# Altium PCB WeatherStation.PcbDoc
Units mil, origin at the board's own origin, x right, y up, seen from the top; angles counter-clockwise.
Board outline 2395 x 2985 mil, 2 copper layers (Top Layer, Bottom Layer); 17 components, 15 nets, 94 pads, 0 vias.
Unrouted connection lines stored in the file: 19.
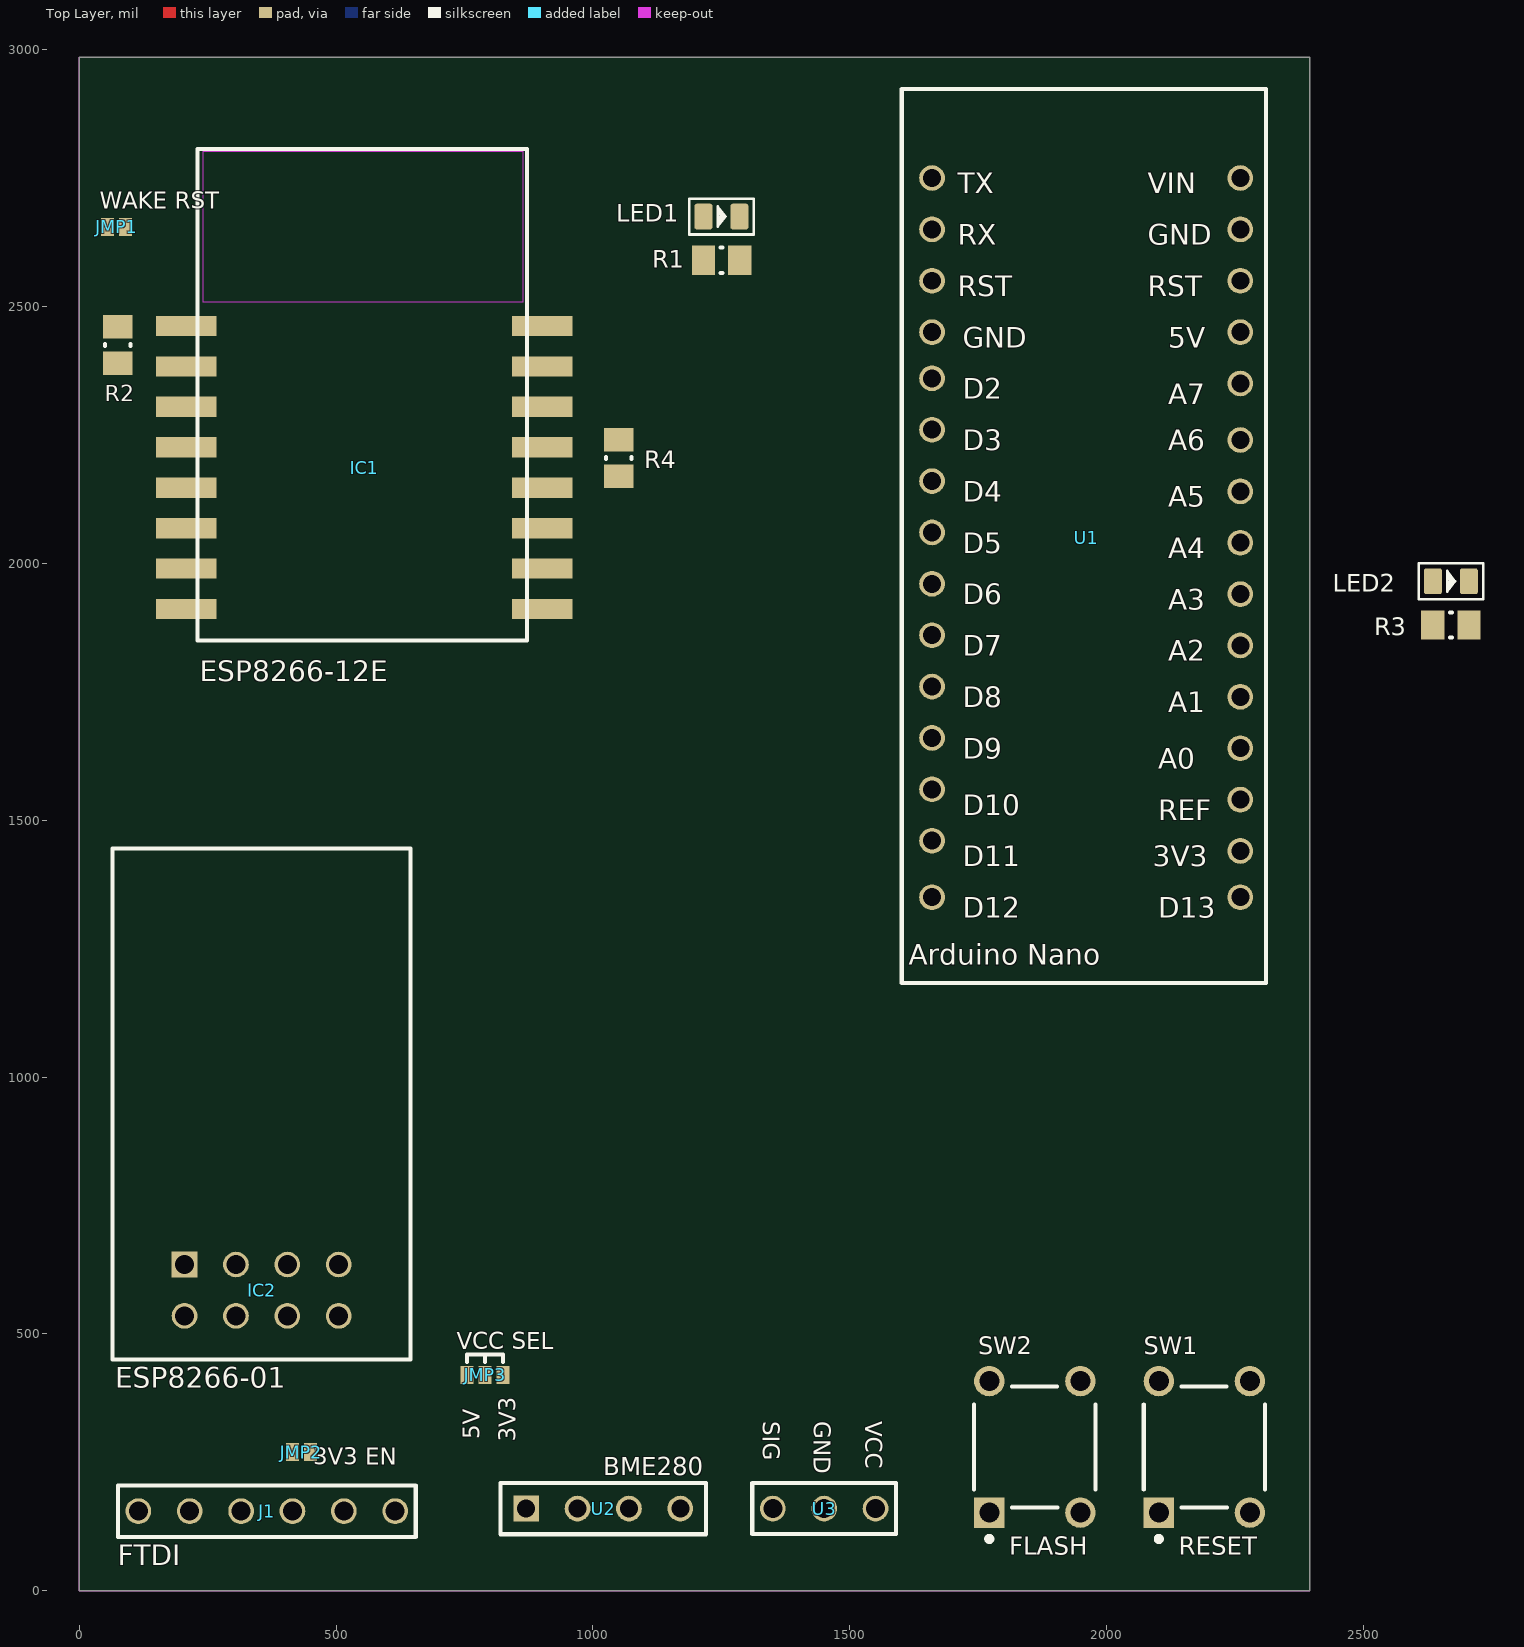
[diagram p0: Top Layer view]
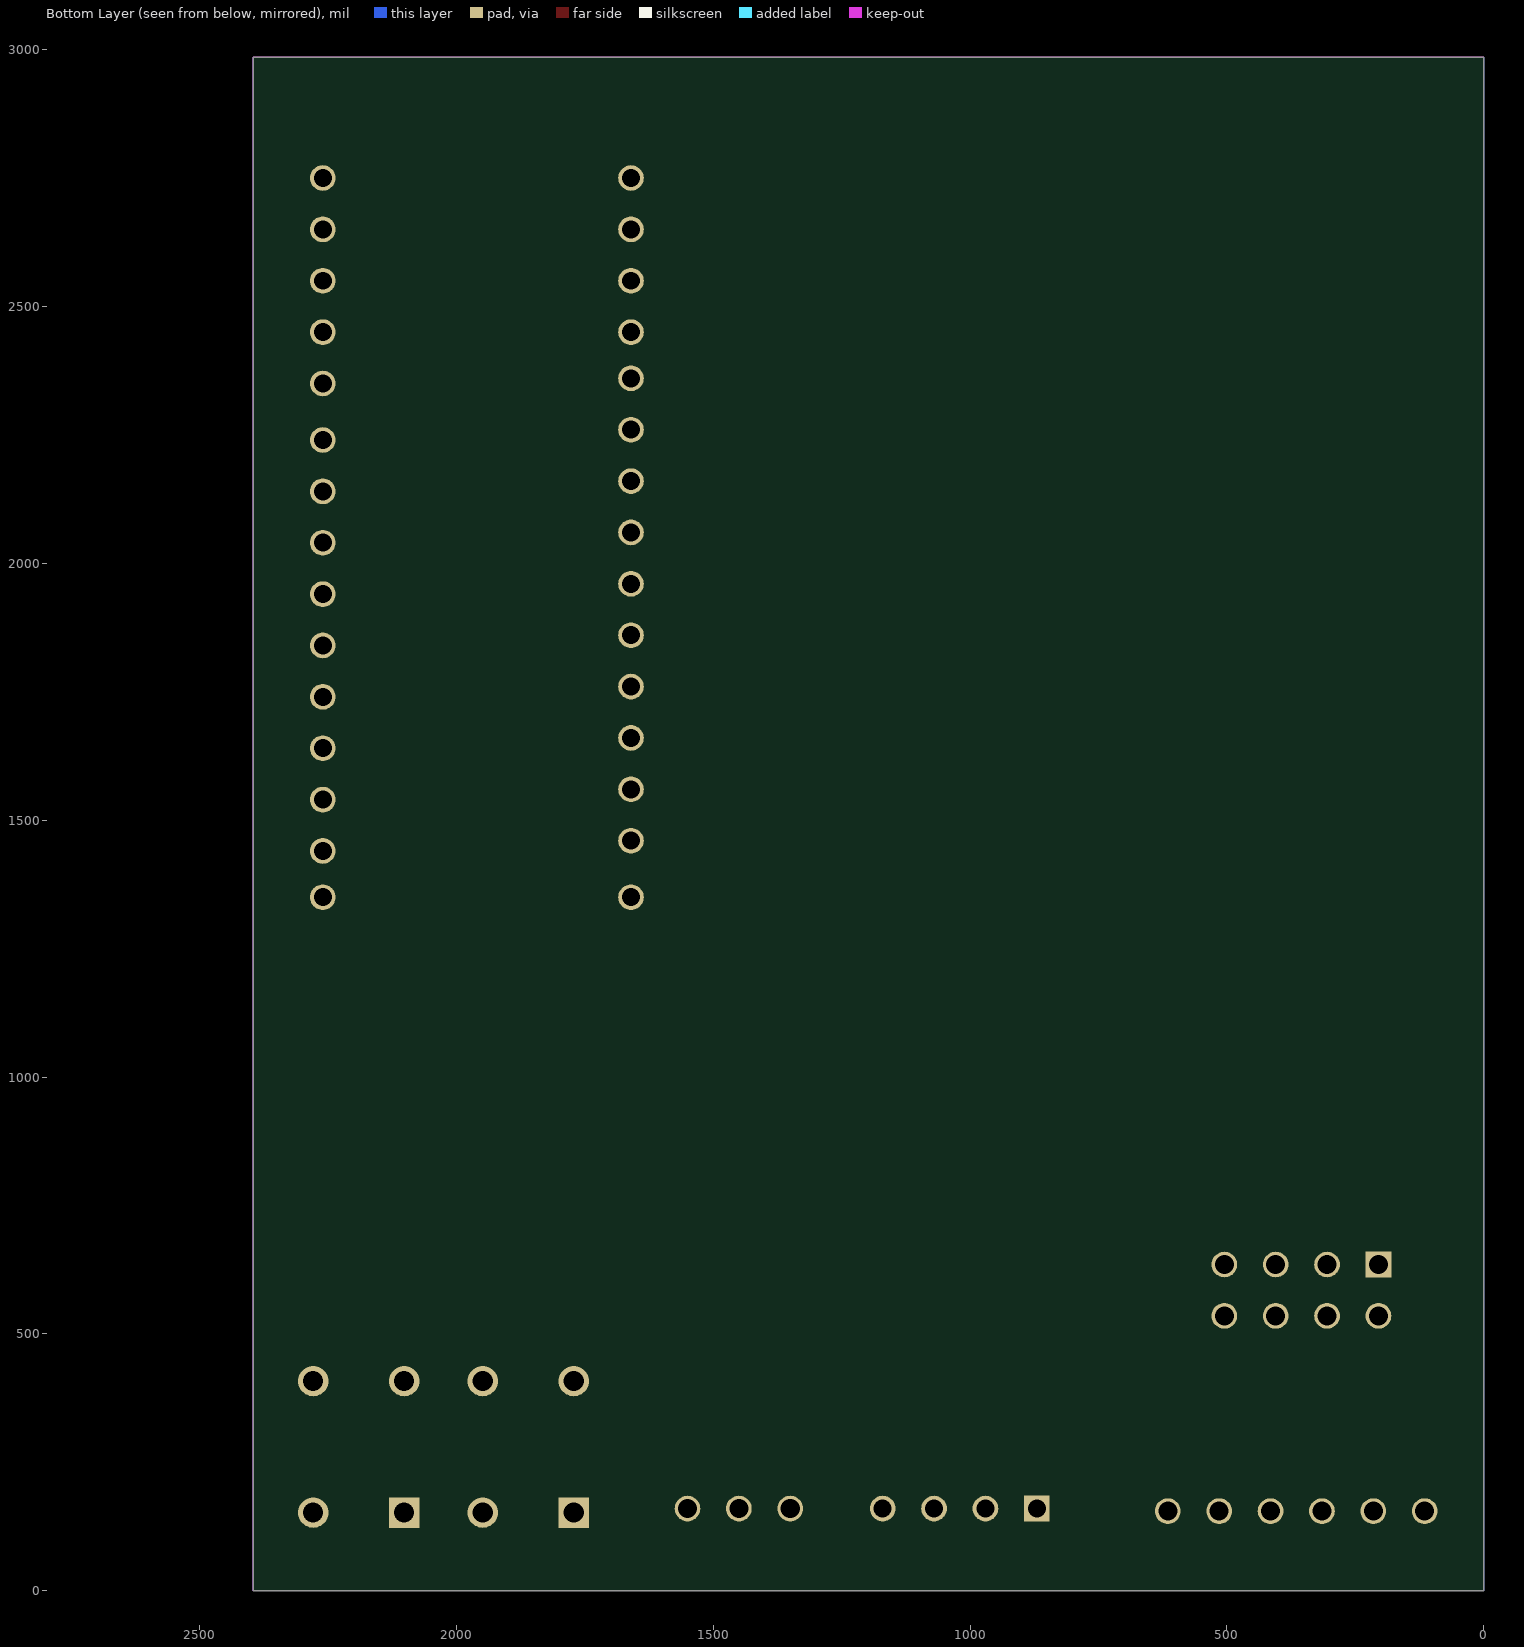
[diagram p1: Bottom Layer view, seen from below]

## Layer stack, top to bottom
Top Solder: solder mask 0.4, Solder Resist, Dk 3.5
Top Layer: signal copper 1.4
Dielectric 1: dielectric 12.6, FR-4, Dk 4.8
Bottom Layer: signal copper 1.4
Bottom Solder: solder mask 0.4, Solder Resist, Dk 3.5

## Board outline
0,0 2395,0 2395,2985 0,2985

## Design rules (kind name [scope] priority, off if disabled: settings)
BoardOutlineClearance [All] p1: gap=15 ignorepadtopadclearanceinfootprint=FALSE
Clearance [All] p1: gap=7 ignorepadtopadclearanceinfootprint=FALSE
PolygonConnect [All] p1: connectstyle=Relief reliefconductorwidth=10 reliefentries=4 polygonreliefangle="90 Angle" airgapwidth=10
RoutingVias [All] p1: holewidth=28 width=50 viastyle="Through Hole" minholewidth=28 minwidth=50 maxholewidth=28 maxwidth=50
SolderMaskExpansion [All] p1: expansion=4
Width [All] p1: maxlimit=200 minlimit=7 preferedwidth=10
30 further rules are at their usual default settings.

## Components (designator, comment, footprint, x,y, rotation, side; value= is the part's Value field where it differs from the comment)
IC1 "ESP8266-12E" ESP8266-12E 240,1840 r0 top locked
IC2 "ESP8266-01" ESP8266-01 205,635 r0 top
J1 "FTDI" HEAD_1x6 115,155 r0 top
JMP1 "WAKE RST" JUMP 55,2655 r0 top
JMP2 "3V3 EN" JUMP 415,270 r0 top
JMP3 "VCC SEL" JMP3 790,420 r180 top
LED1 "POWER" LED-0805 1250,2675 r0 top
LED2 "POWER" LED-0805 2670,1965 r0 top
R1 "RES_0805" CAPC0805(2012)75_N 1250.43,2590 r0 top value=330
R2 "RES_0805" CAPC0805(2012)75_N 75,2425 r90 top value=10K
R3 "RES_0805" CAPC0805(2012)75_N 2670,1880 r0 top value=1K
R4 "RES_0805" CAPC0805(2012)75_N 1050,2205 r90 top value=10K
SW1 "RESET" "TACTILE SWITCH" 2190,280 r90 top
SW2 "FLASH" "TACTILE SWITCH" 1860,280 r90 top
U1 "Arduino Nano" "ARDUINO NANO" 1660,2750 r0 top
U2 "BME280" BME280 870,160 r0 top
U3 "DSB18XX" HEAD_1x3 1550,160 r180 top

## Footprints (in the part's own frame and the unit in brackets; to place one, negate y for a bottom-side part, rotate by r counter-clockwise, add the part's x,y. Pads: shape width x height; smd on the part's side, far side on the other; paste and mask are expansions set on the pad)
"ARDUINO NANO" [mil]
  round 50 hole 35: 0(0,0) 1(0,-100) 2(0,-200) 3(0,-300) 4(0,-390) 5(0,-490) 6(0,-590) 7(0,-690) 8(0,-790) 9(0,-890) 10(0,-990) 11(0,-1090) 12(0,-1190) 13(0,-1290) 14(0,-1400) 15(600,-1400) 16(600,-1310) 17(600,-1210) 18(600,-1110) 19(600,-1010) 20(600,-910) 21(600,-810) 22(600,-710) 23(600,-610) 24(600,-510) 25(600,-400) 26(600,-300) 27(600,-200) 28(600,-100) 29(600,0)
  silkscreen extent -59,-1567 650,173, body extent -63,-1563 646,234, height 512
BME280 [mil]
  rect 50x50 hole 35: 1(0,0)
  round 50 hole 35: 2(100,0) 3(200,0) 4(300,0)
  silkscreen extent -50,-50 350,50
CAPC0805(2012)75_N [mm] "Chip Capacitor, Body 2.0x1.2mm, Height 0.75mm, IPC Medium Density"
  rect 1.15x1.45 smd: 1(-0.9,0) 2(0.9,0)
  silkscreen extent -0.05,-0.62 0.05,0.63, body extent -1.51,-0.72 1.49,0.73, height 0.75
ESP8266-01 [mil]
  rect 50x50 hole 37: 1(0,0)
  round 50 hole 37: 2(0,-100) 3(100,0) 4(100,-100) 5(200,0) 6(200,-100) 7(300,0) 8(300,-100)
  silkscreen extent -140,-185 440,810, body extent -136,-172 434,812, height 230
ESP8266-12E [mm]
  rect 3x1 smd: 1(-0.8,15.8) 2(-0.8,13.8) 3(-0.8,11.8) 4(-0.8,9.8) 5(-0.8,7.8) 6(-0.8,5.8) 7(-0.8,3.8) 8(-0.8,1.8) 9(16.8,1.8) 10(16.8,3.8) 11(16.8,5.8) 12(16.8,7.8) 13(16.8,9.8) 14(16.8,11.8) 15(16.8,13.8) 16(16.8,15.8)
  Top Layer keep-out region: 0,24.402 0,17 15.85,17 15.85,24.402
  silkscreen extent -0.25,0.25 16.05,24.55, body extent -0.1,0.4 24.85,24.4, height 5.9
HEAD_1x3 [mil]
  round 50 hole 37: 1(0,0) 2(100,0) 3(200,0)
  silkscreen extent -40,-50 240,50
HEAD_1x6 [mil]
  round 50 hole 37: 1(0,0) 2(100,0) 3(200,0) 4(300,0) 5(400,0) 6(500,0)
  silkscreen extent -40,-50 540,50
JMP3 [mil]
  rect 25x35 smd: 1(0,0) 2(35,0) 3(-35,0)
  silkscreen extent -35,-40 35,-25
JUMP [mil]
  rect 25x35 smd: 1(0,0) 2(35,0)
LED-0805 [mil]
  rrect25% 35x50 smd: +(-35,0) -(35,0)
  silkscreen extent -62,-35 63,35
"TACTILE SWITCH" [mm]
  rect 1.5x1.5 hole 0.99: 1(-3.25,2.25)
  round 1.5 hole 0.99: 2(3.25,2.25) 3(-3.25,-2.25) 4(3.25,-2.25)
  silkscreen extent -4.67,-2.99 2.99,3, body extent -3.85,-4.25 3.85,3, height 5

## Part data
IC1: library part ESP8266, PART=ESP8266-12E
J1: library part FTDI_Connector
JMP1 JMP2: library part JUMP
JMP3: library part JUMP_3
LED1 LED2: library part SMD-LED-CLEAR-YELLOW(0805), MPN=17-215UYC/S530-A3/TR8
SW1 SW2: library part "Tact Switch"
U3: library part DALLAS_TEMP

## Nets (pads, with @x,y where several pads share a name; then routed paths per layer and width w, separated by ;. In a path a pad name is that pad's centre, name@x,y a point inside that pad or via, vN(x,y) a via of type N, cw(c..) or ccw(c..) an arc to the next point about the centre after c; other vN are vias at no path point)
3V3: IC1.8 IC1.11 IC2.4 IC2.8 JMP2.2 JMP3.3 R1.2 R2.1 R4.1 U1.16
5V: JMP3.2 U1.26
GND: IC1.9 IC1.10 IC2.1 LED1.- LED2.- SW1.3 SW1.4 SW2.3 SW2.4 U1.3 U1.28 U2.2 U3.2
NetIC1_4: IC1.4 JMP1.1
NetIC1_12: IC1.12 R4.2 SW2.1
NetIC1_15: IC1.15 IC2.2 J1.3
NetIC1_16: IC1.16 IC2.7 J1.2
NetJ1_4: J1.4 JMP2.1
NetJ1_6: J1.6 SW2.2
NetLED1_+: LED1.+ R1.1
NetLED2_+: LED2.+ R3.1
RESET: IC1.1 IC2.6 JMP1.2 R2.2 SW1.1 SW1.2 U1.2 U1.27
SCL: U2.3
SDA: U2.4
VCC: JMP3.1 U2.1 U3.1
pads on no net: IC1.2 IC1.3 IC1.5 IC1.6 IC1.7 IC1.13 IC1.14 IC2.3 IC2.5 J1.1 J1.5 R3.2 U1.0 U1.1 U1.4 U1.5 U1.6 U1.7 U1.8 U1.9 U1.10 U1.11 U1.12 U1.13 U1.14 U1.15 U1.17 U1.18 U1.19 U1.20 U1.21 U1.22 U1.23 U1.24 U1.25 U1.29 U3.3

## Polygon pours and split planes (outlines as drawn)
GND on Bottom Layer "NONET_L02_P000" (solid, remove dead copper, shelved, pour order 0): 0,0 2395,0 2395,2985 0,2985

## Keep-outs
Keep-Out Layer:
  lines w1: 0,0 0,5 0,2985 2395,2985 2395,0 0,0

## Silkscreen, mask and mechanical layers (free items; w line width, h text height)
Top Overlay:
  text "5V" at 780,295 h33 r90
  text "3V3" at 850,290 h33 r90

## Text inside footprints (layer, text, board x,y; h text height)
U1: Top Overlay "REF" at 2100,1500 h40; Top Overlay "VIN" at 2080,2720 h40; Top Overlay "GND" at 2080,2620 h40; Top Overlay "RST" at 2080,2520 h40; Top Overlay "3V3" at 2090,1410 h40; Top Overlay "5V" at 2119.99,2420 h40; Top Overlay "A7" at 2119.99,2310 h40; Top Overlay "A6" at 2119.99,2220 h40; Top Overlay "A5" at 2120,2110 h40; Top Overlay "A4" at 2120,2010 h40; Top Overlay "A3" at 2120,1910 h40; Top Overlay "A2" at 2120,1810 h40; Top Overlay "A1" at 2120,1710 h40; Top Overlay "A0" at 2100,1600 h40; Top Overlay "D13" at 2100,1310 h40; Top Overlay "D12" at 1720,1310 h40; Top Overlay "D11" at 1720,1410 h40; Top Overlay "D10" at 1720,1510 h40; Top Overlay "D9" at 1720,1620 h40; Top Overlay "D8" at 1720,1720 h40; Top Overlay "D7" at 1720,1820 h40; Top Overlay "D6" at 1720,1920 h40; Top Overlay "D5" at 1720,2020 h40; Top Overlay "D4" at 1720,2120 h40; Top Overlay "D3" at 1720,2220 h40; Top Overlay "D2" at 1720,2320 h40; Top Overlay "GND" at 1720,2420 h40; Top Overlay "RST" at 1710,2520 h40; Top Overlay "RX" at 1710,2620 h40; Top Overlay "TX" at 1710,2720 h40
U3: Top Overlay "VCC" at 1530,330 h33 r270; Top Overlay "GND" at 1430,330 h33 r270; Top Overlay "SIG" at 1330,330 h33 r270